# EAGLE board SurgicalPCB_trace (EAGLE 6.3)
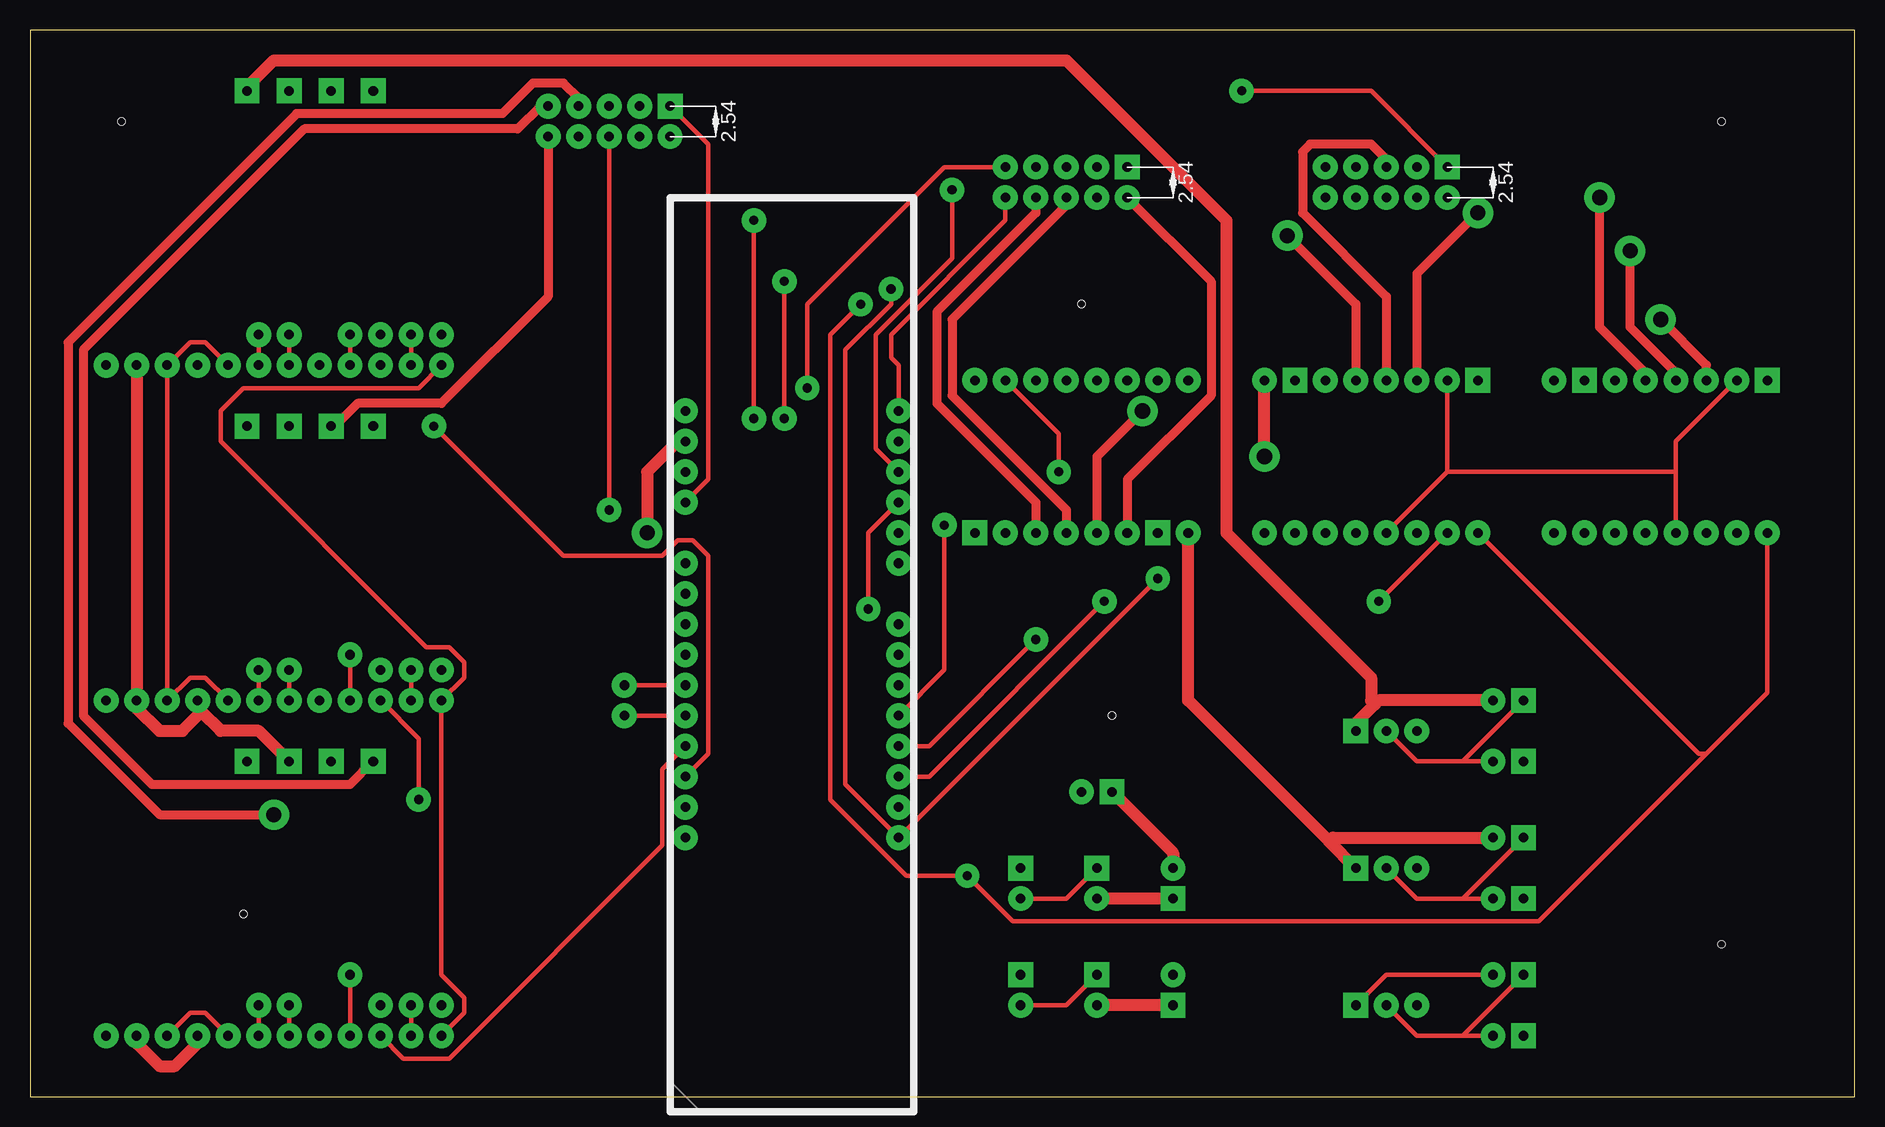
[diagram p0: board, top side]
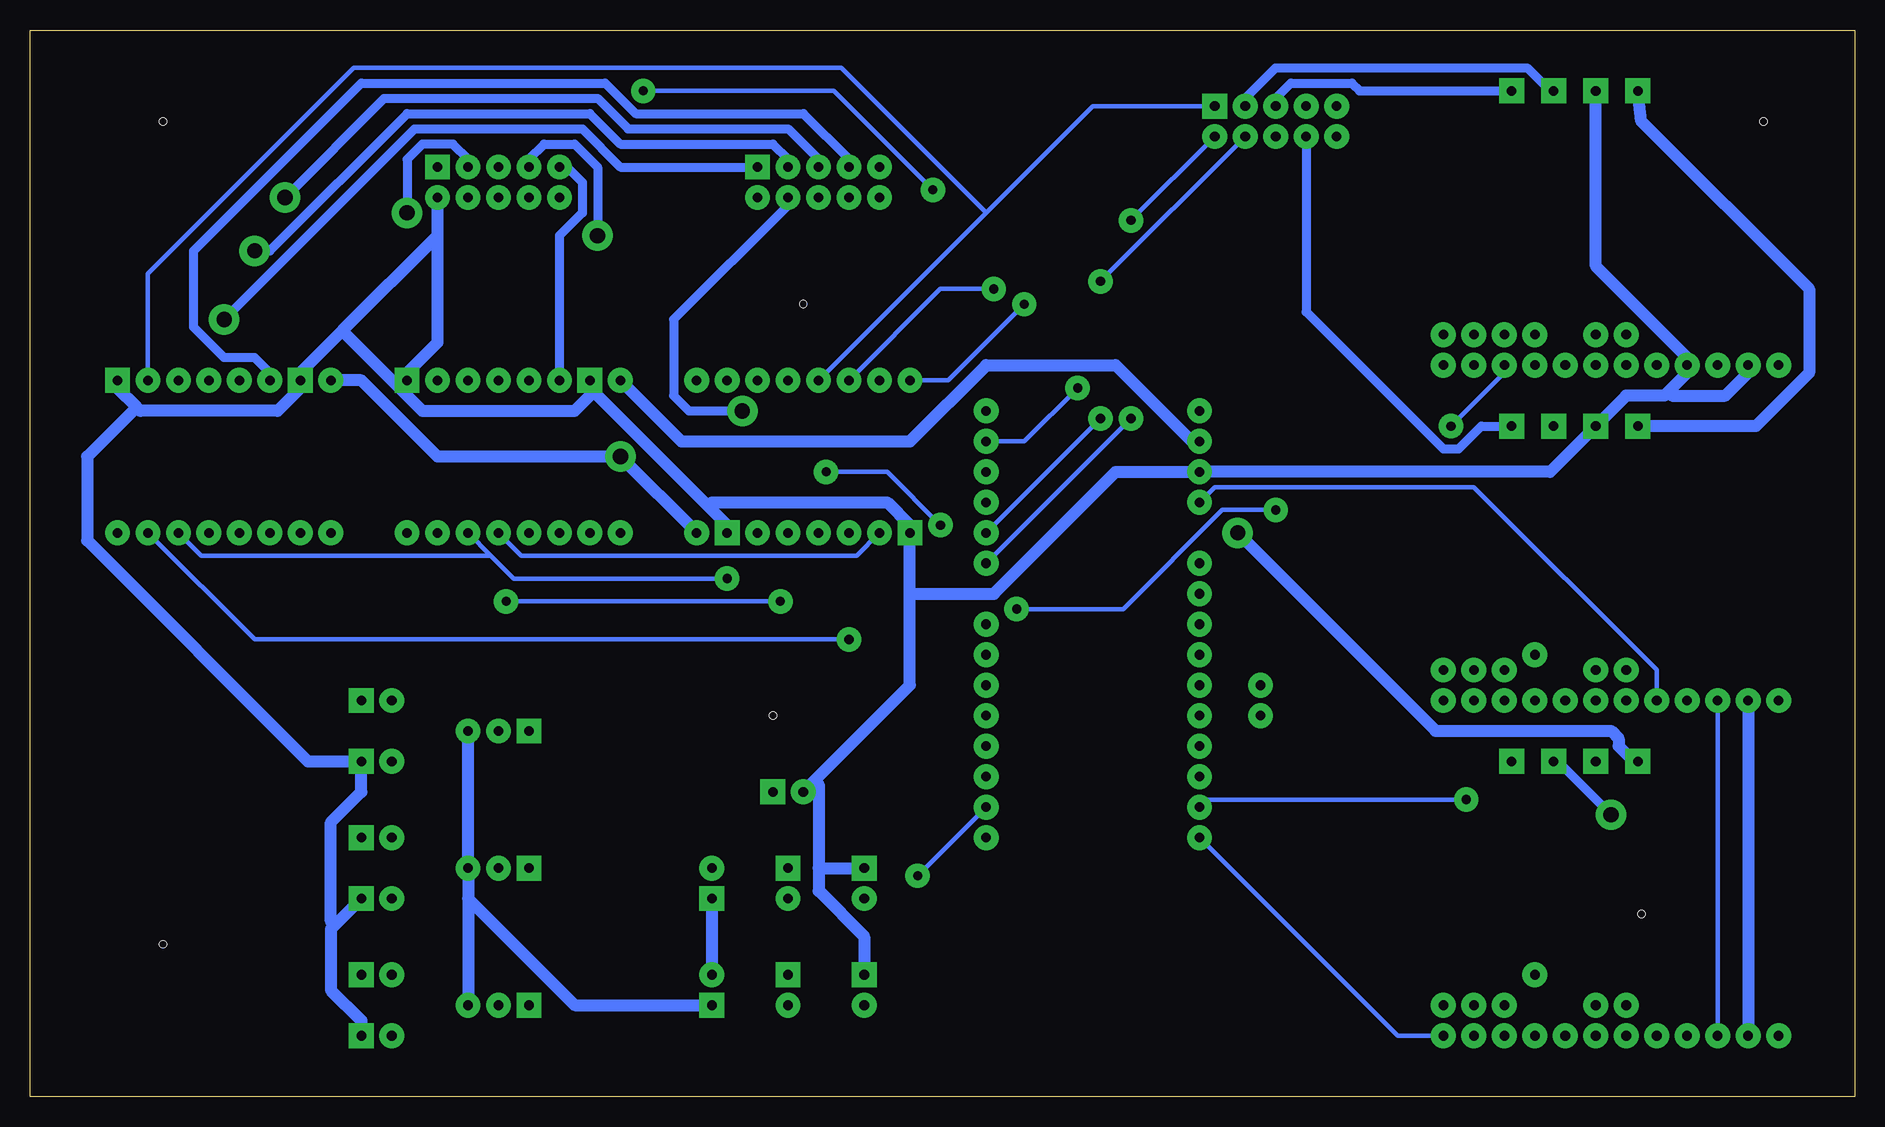
[diagram p1: board, bottom side, seen from below]

Size 152.07 x 88.89 mm. Coordinates in mm from the lower left corner, seen from the top.
Outline: 0,0 152.07,0 152.07,88.89 0,88.89 0,0
Copper layers (1*16): Top 0.035mm / dielectric 1.5mm / Bottom 0.035mm
Design rules "default *": minimum track width 15mil, minimum drill 24mil, track to track 15mil, track to pad 15mil, pad to pad 15mil, via to via 15mil, smd to smd 8mil, copper to edge 20mil, drill to drill 8mil, minimum pad ring 25mil, minimum via ring 25mil, stop-mask expansion 4mil, vias tented up to drill 0mil, thermal gap 10mil
Net classes: 0 default: width 0.381 mm, drill 0.762 mm, clearance 0.381 mm; 1 Power: width 1.016 mm, drill 1.27 mm, clearance 0.381 mm; 2 Motor: width 0.762 mm, drill 1.27 mm, clearance 0.381 mm
Holes 0.6 mm at 17.78,15.24 7.62,81.28 140.97,81.28 140.97,12.7 90.17,31.75 87.63,66.04

## Footprints (pad centres in the part's own frame; a part is rotated, then mirrored left to right if it is on the bottom)
V_REG = drill 0.8: ADJ 0,0; VIN 0,2.54 | drill 0.8 square: VOUT 0,-2.54
RESISTOR = drill 0.8: VIN 0,1.27 | drill 0.8 square: VOUT 0,-1.27
A4955 = drill 0.8: 1A 6.35,-1.27; 1B 6.35,-3.81; 2A 6.35,1.27; 2B 6.35,3.81; !EN -6.35,8.89; !RST -6.35,-1.27; !SLP -6.35,-3.81; DIT -6.35,-8.89; MS1 -6.35,6.35; MS2 -6.35,3.81; MS3 -6.35,1.27; STEP -6.35,-6.35; VDD 6.35,-6.35; VMOT 6.35,8.89 | drill 0.8 square: GND 6.35,6.35; GND_2 6.35,-8.89
BOARDUINO = drill 0.8: 5V 8.89,-2.54; 5V_2 8.89,-10.16; 10 -8.89,12.7; 11 -8.89,10.16; 12 -8.89,7.62; 13 -8.89,5.08; A0 -8.89,-5.08; A1 -8.89,-7.62; A2 -8.89,-10.16; A3 -8.89,-12.7; A4 -8.89,-15.24; A5 -8.89,-17.78; AREF -8.89,0; D2 8.89,5.08; D3 8.89,7.62; D4 8.89,10.16; D5 8.89,12.7; D6 8.89,15.24; D7 8.89,17.78; D8 -8.89,17.78; D9 -8.89,15.24; GND -8.89,2.54; GND_2 8.89,-5.08; GND_3 8.89,-12.7; RESET 8.89,-17.78; RX 8.89,0; TX 8.89,2.54; VIN 8.89,-15.24
MC33926 = drill 0.8: EN -11.43,-7.62; FB -11.43,-5.08; GND -11.43,12.7; IN1 -11.43,5.08; IN2 -11.43,7.62; INV -11.43,-12.7; JP_EN -8.89,-7.62; JP_INV -8.89,-12.7; JP_PWM/D1 -8.89,0; JP_PWM/D2 -8.89,2.54; JP_SLEW -8.89,-10.16; PWM/D1 -11.43,0; PWN/D2 -11.43,2.54; SF -11.43,-2.54; SLEW -11.43,-10.16; VDD -11.43,10.16; VIN -11.43,15.24 | drill 0.8 square: M_GND 11.43,0; M_OUT1 11.43,-7.01; M_OUT2 11.43,-3.505; M_VIN 11.43,3.505
2_5_RIBBON = drill 0.8 square: 1 -1.27,5.08 | drill 0.8: 2 1.27,5.08; 3 -1.27,2.54; 4 1.27,2.54; 5 -1.27,0; 6 1.27,0; 7 -1.27,-2.54; 8 1.27,-2.54; 9 -1.27,-5.08; 10 1.27,-5.08
PROPE_HOLE = drill 0.8: P$1 0,0

## Placement (x,y rotation side)
6V  V_REG  [V_REG]  113.03,30.48 270 top
10V  V_REG  [V_REG]  113.03,19.05 270 top
E_STOP  RESISTOR  [RESISTOR]  95.25,8.89 0 top
EV  V_REG  [V_REG]  113.03,7.62 270 top
LED_GREEN  RESISTOR  [RESISTOR]  82.55,8.89 180 top
LED_R  RESISTOR  [RESISTOR]  82.55,17.78 180 top
LED_RES  RESISTOR  [RESISTOR]  88.9,17.78 180 top
LED_RES_G  RESISTOR  [RESISTOR]  88.9,8.89 180 top
POWER_SWITCH  RESISTOR  [RESISTOR]  95.25,17.78 0 top
POWERPLUG  RESISTOR  [RESISTOR]  88.9,25.4 90 top
RES6-1  RESISTOR  [RESISTOR]  123.19,33.02 90 top
RES_6-2  RESISTOR  [RESISTOR]  123.19,27.94 90 top
RES_10-1  RESISTOR  [RESISTOR]  123.19,21.59 90 top
RES_10-2  RESISTOR  [RESISTOR]  123.19,16.51 90 top
RES_EV-1  RESISTOR  [RESISTOR]  123.19,10.16 90 top
RES_EV-2  RESISTOR  [RESISTOR]  123.19,5.08 90 top
U$1  A4955  [A4955]  111.76,53.34 90 top
U$2  A4955  [A4955]  135.89,53.34 90 top
U$3  A4955  [A4955]  87.63,53.34 270 top
U$4  BOARDUINOSTD  [BOARDUINO]  63.5,39.37 180 top
U$5  MC33926  [MC33926]  21.59,44.45 90 top
U$6  MC33926  [MC33926]  21.59,72.39 90 top
U$7  MC33926  [MC33926]  21.59,16.51 90 top
U$8  2_5_RIBBON  [2_5_RIBBON]  48.26,81.28 270 top
U$9  2_5_RIBBON  [2_5_RIBBON]  113.03,76.2 270 top
U$10  2_5_RIBBON  [2_5_RIBBON]  86.36,76.2 270 top
U$14  PROPE_HOLE  [PROPE_HOLE]  26.67,10.16 0 top
U$23  PROPE_HOLE  [PROPE_HOLE]  26.67,63.5 0 top
U$24  PROPE_HOLE  [PROPE_HOLE]  26.67,36.83 0 top
U$25  PROPE_HOLE  [PROPE_HOLE]  49.53,31.75 0 top
U$26  PROPE_HOLE  [PROPE_HOLE]  49.53,34.29 0 top

## Library data of the parts
6V 10V E_STOP EV LED_GREEN LED_R LED_RES LED_RES_G POWER_SWITCH POWERPLUG RES6-1 RES_6-2 RES_10-1 RES_10-2 RES_EV-1 RES_EV-2 U$5-U$10 U$14 U$23-U$26 = SURGICALv2
U$1-U$3 = A4955
U$4 = SURGICAL

## Nets
6V_RAIL [Power]: 6V.VOUT RES6-1.VIN U$5.M_VIN U$6.M_VIN
10V_RAIL [Power]: 10V.VOUT RES_10-1.VIN U$1.VMOT U$2.VMOT U$3.VMOT U$4.VIN U$7.M_VIN
24V_1 [Power]: POWER_SWITCH.VIN POWERPLUG.VOUT
24V_2 [Power]: E_STOP.VIN LED_RES.VIN POWER_SWITCH.VOUT
24V_3: LED_R.VIN LED_RES.VOUT
24V_4 [Power]: 6V.VIN 10V.VIN E_STOP.VOUT EV.VIN LED_RES_G.VIN
24V_5: LED_GREEN.VIN LED_RES_G.VOUT
GND [Power]: LED_GREEN.VOUT LED_R.VOUT POWERPLUG.VIN RES_6-2.VOUT RES_10-2.VOUT RES_EV-2.VOUT U$1.GND U$1.GND_2 U$2.GND U$2.GND_2 U$3.GND U$3.GND_2 U$4.GND_3 U$5.GND U$5.IN2 U$5.M_GND U$6.GND U$6.IN2 U$6.M_GND U$7.GND U$7.IN2 U$7.M_GND U$9.2
LOGIC_HIGH_RAIL: U$1.!RST U$1.VDD U$2.!RST U$2.VDD U$3.!RST U$3.VDD U$4.5V_2 U$5.IN1 U$5.VDD U$6.IN1 U$6.VDD U$7.IN1 U$7.VDD U$8.1
N$1: U$3.STEP U$4.12
N$2: U$1.!SLP U$2.!SLP U$3.!SLP U$4.D8
N$3: U$1.DIT U$2.DIT U$3.DIT U$4.D9
N$4: U$1.STEP U$4.10
N$5: U$2.STEP U$4.11
N$6: U$7.FB U$14.P$1
N$7: U$6.FB U$23.P$1
N$9: U$5.JP_PWM/D2 U$5.PWN/D2
N$10: U$5.JP_PWM/D1 U$5.PWM/D1
N$11: U$5.JP_SLEW U$5.SLEW
N$12: U$5.FB U$24.P$1
N$13: U$4.D3 U$25.P$1
N$14: U$6.JP_PWM/D2 U$6.PWN/D2
N$15: U$6.JP_PWM/D1 U$6.PWM/D1
N$16: U$6.JP_SLEW U$6.SLEW
N$17: U$4.D2 U$26.P$1
N$19: U$7.JP_PWM/D2 U$7.PWN/D2
N$20: U$7.JP_PWM/D1 U$7.PWM/D1
N$21: U$7.JP_SLEW U$7.SLEW
N$22: U$4.D7 U$5.INV U$6.INV U$7.INV
N$23 [Motor]: U$5.M_OUT2 U$8.10
N$24: U$4.D6 U$5.EN
N$25: U$4.D5 U$6.EN
N$26: U$4.D4 U$7.EN
N$27 [Motor]: U$5.M_OUT1 U$8.8
N$28 [Motor]: U$6.M_OUT2 U$8.3
N$29 [Motor]: U$6.M_OUT1 U$8.5
N$30 [Motor]: U$7.M_OUT2 U$8.7
N$31 [Motor]: U$7.M_OUT1 U$8.9
N$32: U$4.A2 U$8.6
N$33: U$4.A1 U$8.4
N$34: U$4.A0 U$8.2
N$35 [Motor]: U$3.2B U$10.2
N$36 [Motor]: U$3.2A U$10.4
N$37 [Motor]: U$3.1A U$10.6
N$38 [Motor]: U$3.1B U$10.8
N$39: U$4.A5 U$10.10
N$40 [Motor]: U$2.1B U$10.1
N$41 [Motor]: U$2.1A U$10.3
N$42 [Motor]: U$2.2A U$10.5
N$43 [Motor]: U$2.2B U$10.7
N$44: U$4.A4 U$10.9
N$45 [Motor]: U$1.2B U$9.9
N$46 [Motor]: U$1.2A U$9.7
N$47 [Motor]: U$1.1A U$9.5
N$48 [Motor]: U$1.1B U$9.3
N$49: U$4.A3 U$9.1
N$52: 10V.ADJ RES_10-1.VOUT RES_10-2.VIN
N$60: 6V.ADJ RES6-1.VOUT RES_6-2.VIN
N$64: EV.VOUT RES_EV-1.VIN
N$65: EV.ADJ RES_EV-1.VOUT RES_EV-2.VIN

## Tracks (layer width: path | path; a pad name or v marks a point on that pad's centre or on a via)
6V_RAIL
  Top 1.016: 6V.VOUT 110.49,31.11 112.08,32.7 | 112.08,32.7 112.39,33.02 RES6-1.VIN | 112.08,32.7 111.76,33.02 111.76,34.92 99.69,46.99 99.69,73.03 86.36,86.36 20.32,86.36 17.78,83.82 U$6.M_VIN
  Bottom 1.016: U$5.M_VIN 8.26,55.88 3.81,60.33 3.81,67.31 17.78,81.28 U$6.M_VIN
10V_RAIL  (via drill 1.27)
  Top 1.016: v51.44,46.99 51.44,52.07 53.98,54.61 U$4.VIN | U$3.VMOT 96.52,33.02 108.27,21.27 | 10V.VOUT 108.27,21.27 | RES_10-1.VIN 108.58,21.59 108.27,21.27 | v102.87,53.34 U$1.VMOT
  Bottom 1.016: v51.44,46.99 34.92,30.48 20.32,30.48 19.68,29.84 19.68,29.21 18.41,27.94 U$7.M_VIN | U$3.VMOT v102.87,53.34 118.11,53.34 124.46,59.69 U$2.VMOT | U$4.VIN 55.24,54.61 61.59,60.96 72.39,60.96 78.74,54.61 97.79,54.61 U$1.VMOT
24V_1
  Top 1.016: POWER_SWITCH.VIN 95.25,20.32 POWERPLUG.VOUT
24V_2
  Top 1.016: POWER_SWITCH.VOUT LED_RES.VIN
  Bottom 1.016: POWER_SWITCH.VOUT E_STOP.VIN
24V_3
  Top 0.381: LED_R.VIN 86.36,16.51 LED_RES.VOUT
24V_4
  Top 1.016: E_STOP.VOUT LED_RES_G.VIN
  Bottom 1.016: 115.57,16.51 10V.VIN 6V.VIN | 115.57,16.51 EV.VIN | E_STOP.VOUT 106.68,7.62 115.57,16.51
24V_5
  Top 0.381: LED_GREEN.VIN 86.36,7.62 LED_RES_G.VOUT
GND
  Top 1.016: U$5.IN2 13.97,32.38 14.29,32.07 | 14.29,32.07 15.88,30.48 19.05,30.48 U$7.M_GND | U$7.IN2 13.97,4.45 12.06,2.54 10.79,2.54 8.89,4.45 U$7.GND | 14.29,32.07 12.7,30.48 10.79,30.48 8.89,32.38 U$5.GND U$6.GND
  Bottom 1.016: U$5.GND U$7.GND | 15.56,58.74 13.97,60.33 U$6.IN2 13.97,61.59 21.59,69.22 U$6.M_GND | 15.56,58.74 15.88,58.42 19.05,58.42 U$5.M_GND 25.4,52.07 U$4.GND_3 61.59,52.07 71.75,41.91 78.74,41.91 | U$6.GND 8.89,60.33 10.79,58.42 15.24,58.42 15.56,58.74 | 78.74,41.91 78.74,34.29 86.68,26.35 | 78.74,41.91 U$3.GND_2 78.74,47.62 80.64,49.53 95.25,49.53 95.57,49.21 | POWERPLUG.VIN 86.68,26.35 | LED_GREEN.VOUT 82.55,13.34 86.36,17.14 86.36,19.05 | 86.36,19.05 86.36,26.04 86.68,26.35 | 86.36,19.05 LED_R.VOUT | U$3.GND 93.98,47.62 95.57,49.21 | 105.09,58.74 105.41,59.05 U$1.GND | 105.09,58.74 95.57,49.21 | RES_EV-2.VOUT 124.46,6.35 127,8.89 127,13.97 126.68,14.29 | RES_10-2.VOUT 126.68,14.29 | 126.68,14.29 127,14.61 127,22.86 124.46,25.4 RES_6-2.VOUT 128.91,27.94 147.32,46.35 147.32,53.34 143.19,57.47 | 118.11,71.75 118.11,62.87 120.65,60.33 U$1.GND_2 | 118.11,71.75 U$9.2 | 118.11,71.75 126.05,63.82 | 126.05,63.82 129.54,60.33 U$2.GND 129.54,59.05 131.44,57.15 142.88,57.15 143.19,57.47 | U$2.GND_2 144.78,59.05 143.19,57.47 | 105.09,58.74 106.68,57.15 119.38,57.15 126.05,63.82
LOGIC_HIGH_RAIL
  Top 0.381: 137.16,52.07 137.16,54.61 U$2.VDD | 137.16,52.07 U$2.!RST | 118.11,52.07 U$1.VDD | U$1.!RST 118.11,52.07 | 118.11,52.07 137.16,52.07 | U$6.IN1 14.61,62.87 13.34,62.87 U$6.VDD U$5.VDD 13.34,34.92 14.61,34.92 U$5.IN1 | U$7.VDD 13.34,6.99 14.61,6.99 U$7.IN1 | U$4.5V_2 56.52,51.44 56.52,79.38 U$8.1
  Bottom 0.381: U$3.VDD 83.19,45.09 111.12,45.09 U$1.!RST | U$5.VDD U$7.VDD | 72.39,73.66 63.5,82.55 U$8.1 | 72.39,73.66 U$3.!RST | U$5.IN1 16.51,35.56 31.75,50.8 53.34,50.8 U$4.5V_2 | U$2.VDD 142.24,68.58 125.09,85.72 84.45,85.72 72.39,73.66
N$1  (via drill 0.76)
  Top 0.381: U$4.12 76.2,35.56 v76.2,47.62 | v85.72,52.07 85.72,55.24 U$3.STEP
  Bottom 0.381: v76.2,47.62 80.64,52.07 v85.72,52.07
N$2  (via drill 0.76)
  Top 0.381: v93.98,43.18 U$4.D8 67.94,26.04 67.94,62.23 71.75,66.04 v71.75,67.31
  Bottom 0.381: v93.98,43.18 111.76,43.18 113.67,45.09 | U$1.!SLP 113.67,45.09 | U$3.!SLP 76.2,67.31 v71.75,67.31 | U$2.!SLP 137.79,45.09 113.67,45.09
N$3  (via drill 0.76)
  Top 0.381: 139.7,28.57 144.78,33.66 U$2.DIT | 139.7,28.57 125.73,14.61 81.92,14.61 v78.11,18.41 73.03,18.41 66.67,24.77 66.67,63.5 v69.22,66.04 | U$1.DIT 139.06,28.57 139.7,28.57
  Bottom 0.381: v78.11,18.41 U$4.D9 | U$3.DIT 75.56,59.69 v69.22,66.04
N$4  (via drill 0.76)
  Top 0.381: U$4.10 74.93,26.67 v89.53,41.27 | U$1.STEP v112.39,41.27
  Bottom 0.381: v112.39,41.27 v89.53,41.27
N$5  (via drill 0.76)
  Top 0.381: U$4.11 74.93,29.21 v83.82,38.1
  Bottom 0.381: v83.82,38.1 133.35,38.1 U$2.STEP
N$6
  Top 0.381: U$14.P$1 U$7.FB
N$7
  Top 0.381: U$23.P$1 U$6.FB
N$9
  Top 0.381: U$5.JP_PWM/D2 U$5.PWN/D2
N$10
  Top 0.381: U$5.JP_PWM/D1 U$5.PWM/D1
N$11
  Top 0.381: U$5.JP_SLEW U$5.SLEW
N$12
  Top 0.381: U$24.P$1 U$5.FB
N$13
  Top 0.381: U$4.D3 U$25.P$1
N$14
  Top 0.381: U$6.JP_PWM/D2 U$6.PWN/D2
N$15
  Top 0.381: U$6.JP_PWM/D1 U$6.PWM/D1
N$16
  Top 0.381: U$6.JP_SLEW U$6.SLEW
N$17
  Top 0.381: U$4.D2 U$26.P$1
N$19
  Top 0.381: U$7.JP_PWM/D2 U$7.PWN/D2
N$20
  Top 0.381: U$7.JP_PWM/D1 U$7.PWM/D1
N$21
  Top 0.381: U$7.JP_SLEW U$7.SLEW
N$22
  Top 0.381: U$7.INV 36.2,6.99 36.2,8.26 34.29,10.16 U$5.INV 36.2,34.92 36.2,36.2 34.92,37.47 33.02,37.47 15.88,54.61 15.88,57.15 17.78,59.05 32.38,59.05 U$6.INV
  Bottom 0.381: U$7.INV 38.1,5.08 U$4.D7
N$23
  Top 0.762: U$8.10 43.18,66.67 34.29,57.78 27.3,57.78 25.4,55.88 U$5.M_OUT2
N$24  (via drill 0.76)
  Top 0.381: U$5.EN 32.38,29.84 v32.38,24.77
  Bottom 0.381: v32.38,24.77 53.98,24.77 U$4.D6
N$25  (via drill 0.76)
  Top 0.381: U$4.D5 56.52,28.57 56.52,45.09 55.24,46.35 53.98,46.35 52.7,45.09 44.45,45.09 v33.66,55.88
  Bottom 0.381: v33.66,55.88 29.21,60.33 U$6.EN
N$26
  Top 0.381: U$7.EN 31.11,3.17 34.92,3.17 52.7,20.95 52.7,27.3 U$4.D4
N$27
  Bottom 0.762: U$5.M_OUT1 31.11,55.88 33.02,53.98 34.29,53.98 45.72,65.41 U$8.8
N$28
  Bottom 0.762: U$8.3 50.8,83.19 48.26,85.72 27.3,85.72 25.4,83.82 U$6.M_OUT2
N$29
  Bottom 0.762: U$6.M_OUT1 41.27,83.82 41.91,84.45 46.99,84.45 48.26,83.19 U$8.5
N$30  (via drill 1.27)
  Top 0.762: v20.32,23.5 10.79,23.5 3.17,31.11 3.17,62.87 22.23,81.92 39.37,81.92 41.91,84.45 44.45,84.45 45.72,83.19 U$8.7
  Bottom 0.762: v20.32,23.5 24.77,27.94 U$7.M_OUT2
N$31
  Top 0.762: U$8.9 42.55,82.55 40.64,80.64 22.86,80.64 4.45,62.23 4.45,31.75 10.16,26.04 26.67,26.04 28.57,27.94 U$7.M_OUT1
N$32  (via drill 0.76)
  Top 0.381: U$4.A2 69.85,46.99 v69.85,40.64 | U$8.6 v48.26,48.9
  Bottom 0.381: v69.85,40.64 60.96,40.64 52.7,48.9 v48.26,48.9
N$33  (via drill 0.76)
  Top 0.381: v62.87,67.94 v62.87,56.52
  Bottom 0.381: v62.87,56.52 U$4.A1 | U$8.4 v62.87,67.94
N$34  (via drill 0.76)
  Top 0.381: v60.33,73.03 v60.33,56.52
  Bottom 0.381: v60.33,56.52 U$4.A0 | U$8.2 v60.33,73.03
N$35
  Top 0.762: U$3.2B 91.44,51.44 98.42,58.42 98.42,67.94 U$10.2
N$36  (via drill 1.27)
  Top 0.762: U$3.2A 88.9,53.34 v92.71,57.15
  Bottom 0.762: v92.71,57.15 97.16,57.15 98.42,58.42 98.42,64.77 88.9,74.3 U$10.4
N$37
  Top 0.762: U$3.1A 86.36,48.9 76.83,58.42 76.83,64.77 86.36,74.3 U$10.6
N$38
  Top 0.762: U$3.1B 83.82,49.53 75.56,57.78 75.56,65.41 83.82,73.66 U$10.8
N$39
  Top 0.381: U$4.A5 72.39,60.96 71.75,61.59 71.75,63.5 81.28,73.03 U$10.10
N$40  (via drill 1.27)
  Top 0.762: v135.89,64.77 139.7,60.96 U$2.1B
  Bottom 0.762: U$10.1 102.87,77.47 106.05,80.64 120.02,80.64 v135.89,64.77
N$41  (via drill 1.27)
  Top 0.762: v133.35,70.48 133.35,64.14 137.16,60.33 U$2.1A
  Bottom 0.762: U$10.3 88.9,78.11 90.17,79.38 102.87,79.38 105.41,81.92 120.65,81.92 132.08,70.48 v133.35,70.48
N$42  (via drill 1.27)
  Top 0.762: v130.81,74.93 130.81,64.14 134.62,60.33 U$2.2A
  Bottom 0.762: U$10.5 86.36,78.11 88.9,80.64 102.23,80.64 104.78,83.19 122.56,83.19 v130.81,74.93
N$43
  Bottom 0.762: U$10.7 83.82,78.11 87.63,81.92 101.6,81.92 104.14,84.45 124.46,84.45 138.43,70.48 138.43,64.14 135.89,61.59 133.35,61.59 132.08,60.33 U$2.2B
N$44  (via drill 0.76)
  Top 0.381: v64.77,59.05 64.77,66.04 76.2,77.47 U$10.9
  Bottom 0.381: U$4.A4 69.22,54.61 v64.77,59.05
N$45
  Bottom 0.762: U$1.2B 107.95,71.75 106.05,73.66 106.05,76.2 107.31,77.47 U$9.9
N$46  (via drill 1.27)
  Top 0.762: U$1.2A 110.49,66.04 v104.78,71.75
  Bottom 0.762: v104.78,71.75 104.78,77.47 106.68,79.38 109.22,79.38 110.49,78.11 U$9.7
N$47
  Top 0.762: U$1.1A 113.03,66.67 106.05,73.66 106.05,78.74 106.68,79.38 111.76,79.38 113.03,78.11 U$9.5
N$48  (via drill 1.27)
  Top 0.762: U$1.1B 115.57,68.58 v120.65,73.66
  Bottom 0.762: v120.65,73.66 120.65,78.11 119.38,79.38 116.84,79.38 115.57,78.11 U$9.3
N$49  (via drill 0.76)
  Top 0.381: U$4.A3 70.48,53.98 70.48,63.5 76.83,69.85 v76.83,75.56 | v100.97,83.82 111.76,83.82 U$9.1
  Bottom 0.381: v76.83,75.56 85.09,83.82 v100.97,83.82
N$52
  Top 0.381: 10V.ADJ 115.57,16.51 119.38,16.51 | RES_10-2.VIN 119.38,16.51 | 119.38,16.51 RES_10-1.VOUT
N$60
  Top 0.381: 6V.ADJ 115.57,27.94 119.38,27.94 | RES_6-2.VIN 119.38,27.94 | 119.38,27.94 RES6-1.VOUT
N$64
  Top 0.381: EV.VOUT 113.03,10.16 RES_EV-1.VIN
N$65
  Top 0.381: EV.ADJ 115.57,5.08 119.38,5.08 | RES_EV-2.VIN 119.38,5.08 | 119.38,5.08 RES_EV-1.VOUT